# Altium PCB PCB-NCMate-4_2023-08-02.pcbdoc (part 2 of 2)
Units mil, origin at the board's own origin, x right, y up, seen from the top; angles counter-clockwise.
Board outline 7109.99 x 5739.53 mil, 4 copper layers (Top Layer, Mid-Layer 1, Mid-Layer 2, Bottom Layer); 194 components, 159 nets, 662 pads, 368 vias.
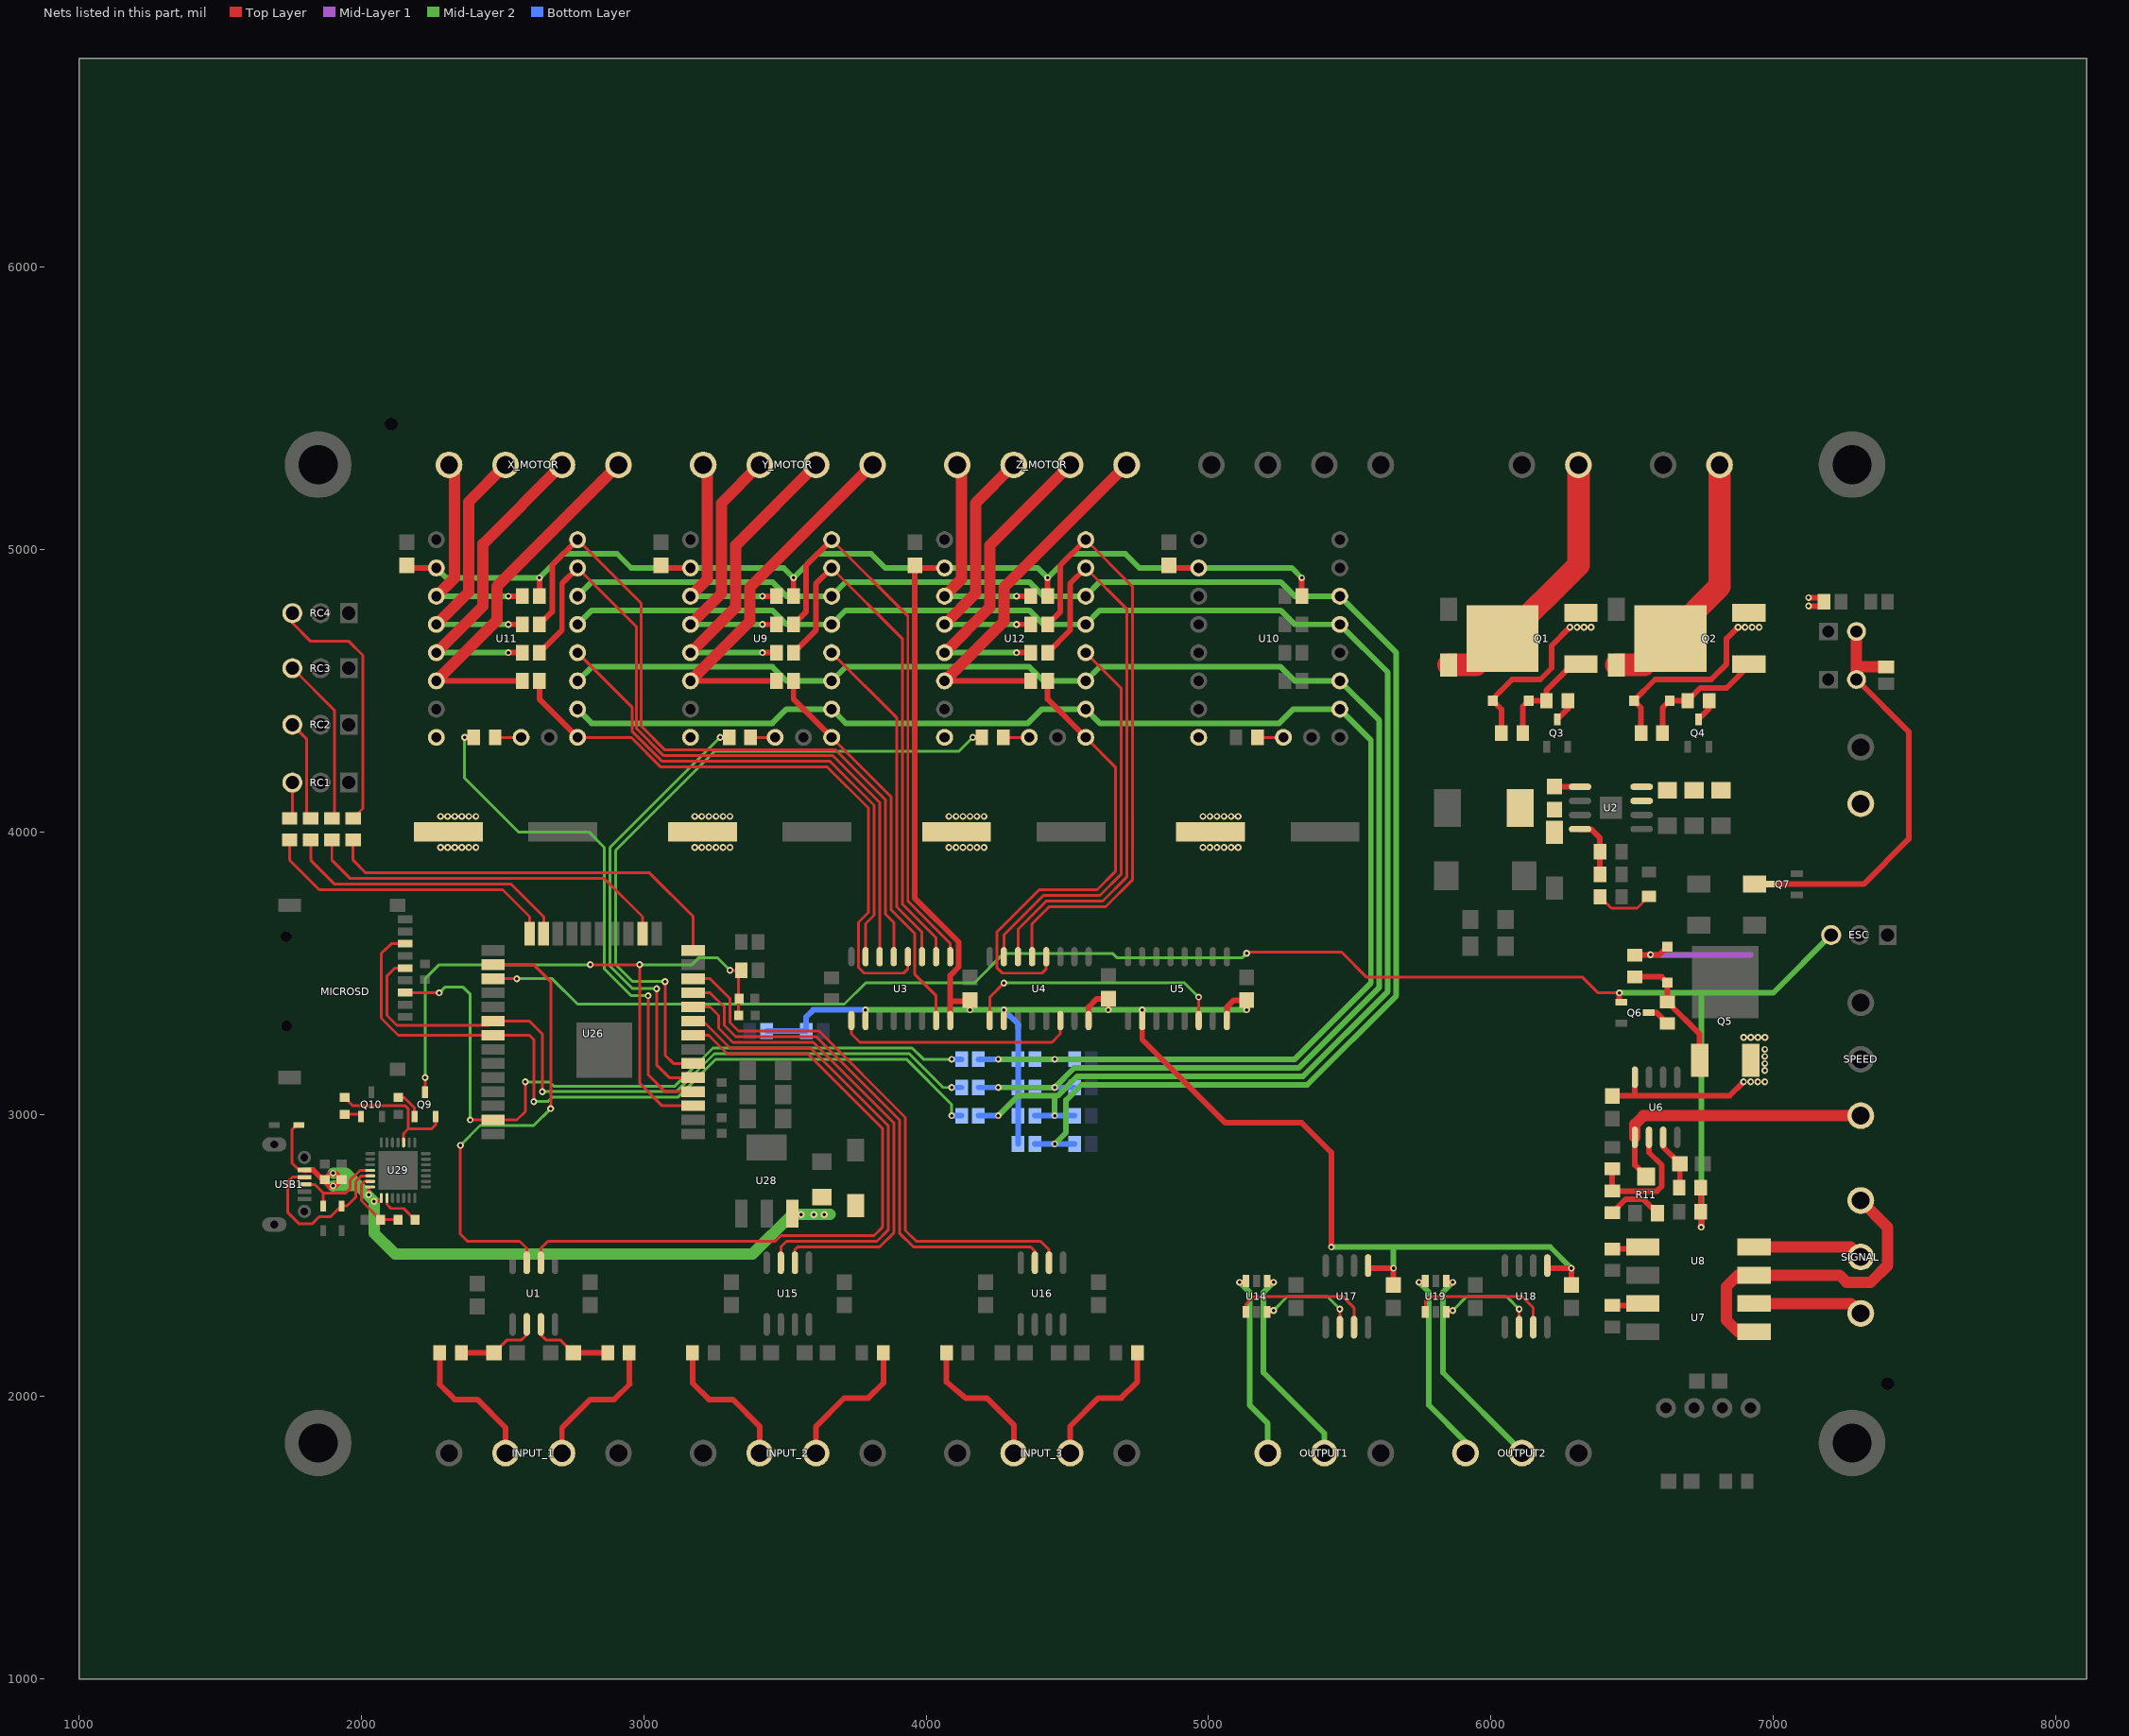
[diagram p4: the nets of this part, all layers, seen from the top]

## Via types
v1: diameter 24, hole 12, Top Layer to Bottom Layer, tented both sides, 368 vias

## Nets (pads, with @x,y where several pads share a name; then routed paths per layer and width w, separated by ;. In a path a pad name is that pad's centre, name@x,y a point inside that pad or via, vN(x,y) a via of type N, cw(c..) or ccw(c..) an arc to the next point about the centre after c; other vN are vias at no path point) (continued)
IN_1: U1.7 U26.26 | length 1674.6
  Top Layer w10: v1(2349.99,2890) 2349.99,2575 2374.99,2550 2559.99,2550 2584.99,2525 U1.7@2584.99,2474.15 ; U26.26@2465.67,3530.07 2609.93,3530.07 2670,3470 v1(2670,3020)
  Mid-Layer 2 w10: v1(2349.99,2890) 2419.99,2960 2609.99,2960 v1(2670,3020)
IN_2: U1.6 U26.8 | length 2449.3
  Top Layer w10: U1.6@2634.99,2474.15 2634.99,2525 2659.99,2550 3464.99,2550 3484.99,2570 3814.99,2570 3844.99,2600 3844.99,2950 3579.99,3215 3294.99,3215 3229.89,3280.1 U26.8@3174.32,3280.07
IN_3: U15.7 U26.9 | length 1674.7
  Top Layer w10: U26.9@3174.32,3330.07 3209.89,3330.1 3304.99,3235 3589.99,3235 3864.99,2960 3864.99,2590 3824.99,2550 3504.99,2550 3484.99,2530 U15.7@3484.99,2474.15
IN_4: U15.6 U26.10 | length 1717.6
  Top Layer w10: U26.10@3174.32,3380.07 3234.89,3380.1 3264.99,3350 3264.99,3305 3314.99,3255 3599.99,3255 3884.99,2970 3884.99,2580 3834.99,2530 3544.99,2530 3534.99,2520 U15.6@3534.99,2474.15
IN_5: U16.7 U26.11 | length 1902.9
  Top Layer w10: U26.11@3174.32,3430.07 3234.89,3430.1 3284.99,3380 3284.99,3315 3324.99,3275 3609.99,3275 3904.99,2980 3904.99,2580 3954.99,2530 4369.99,2530 4384.99,2515 U16.7@4384.99,2474.15
IN_6: U16.6 U26.12 | length 1988.3
  Top Layer w10: U26.12@3174.32,3480.07 3234.89,3480.1 3304.99,3410 3304.99,3325 3334.99,3295 3619.99,3295 3925.99,2989 3925.99,2589 3964.99,2550 4404.99,2550 4434.99,2520 U16.6@4434.99,2474.15
INPUT_1_2: INPUT_1.2 R31.2 | length 495
  Top Layer w20: 2276.95,2046.96 2274.99,2045 2329.99,1990 2409.99,1990 2509.99,1890 INPUT_1.2@2509.99,1800 ; 2276.95,2051.96 R31.2@2276.95,2155
INPUT_1_3: INPUT_1.3 R32.2 | length 500
  Top Layer w20: INPUT_1.3@2709.99,1800 2709.99,1890 2809.99,1990 2894.99,1990 2949.99,2045 2948.03,2046.96 ; 2948.03,2051.96 R32.2@2948.03,2155
INPUT_2_2: INPUT_2.2 R63.2 | length 498.4
  Top Layer w20: 3171.95,2048.04 3229.99,1990 3314.99,1990 3409.99,1895 INPUT_2.2@3409.99,1800 ; 3171.95,2053.04 R63.2@3171.95,2155
INPUT_2_3: INPUT_2.3 R62.2 | length 498.4
  Top Layer w20: INPUT_2.3@3609.99,1800 3609.99,1895 3709.99,1995 3794.99,1995 3848.03,2048.04 ; 3848.03,2053.04 R62.2@3848.03,2155
LED1_2: LED1.2 R3.1 | length 206.9
  Top Layer w10: R3.1@6386.96,3770 6426.96,3730 6518.29,3730 LED1.2@6559.99,3771.7
M0: JP11.2 JP12.2 JP30.2 U9.2 U10.2 U11.2 U12.2 | length 5481.7
  Mid-Layer 2 w20: U11.2@2764.99,4435 2814.99,4385 3454.99,4385 3504.99,4435 U9.2@3664.99,4435 3714.99,4385 4359.99,4385 4409.99,4435 U12.2@4564.99,4435 4614.99,4385 5249.99,4385 5299.99,4435 U10.2@5464.99,4435 5575,4324.99 5575,3465 5305,3195 v1(4455,3195) v1(4255,3195)
  Bottom Layer w20: JP12.2@4185.01,3195 v1(4255,3195) ; JP11.2@4385.01,3195 JP30.2@4525.01,3195
M1: JP13.2 JP14.2 JP31.2 U9.3 U10.3 U11.3 U12.3 | length 5674.3
  Mid-Layer 2 w20: U11.3@2764.99,4535 2814.99,4585 3454.99,4585 3504.99,4535 U9.3@3664.99,4535 3714.99,4585 4364.99,4585 4414.99,4535 U12.3@4564.99,4535 4614.99,4585 5254.99,4585 5304.99,4535 U10.3@5464.99,4535 5604.99,4395 5604.99,3450 5319.99,3165 4524.99,3165 v1(4455,3095) v1(4254.99,3095)
  Bottom Layer w20: JP14.2@4185.01,3095 v1(4254.99,3095) ; JP13.2@4385.01,3095 JP31.2@4525,3095
MISO: JP6.1 MICROSD.7 U26.31 | length 2802.9
  Top Layer w10: MICROSD.7@2154.73,3604.19 2105.79,3604.2 2069.99,3570 2069.99,3340 2129.89,3280.1 U26.31@2465.67,3280.07 ; U26.31@2465.67,3280.07 2594.93,3280.07 2609.99,3265.01 v1(2609.99,3045)
  Mid-Layer 2 w10: v1(2609.99,3045) 2659.99,3045 2674.99,3060 3119.99,3060 3254.99,3195 3929.99,3195 4089.99,3035 v1(4089.99,2995)
  Bottom Layer w20: v1(4089.99,2995) 4099.99,2995 JP6.1@4125.01,2995
MOSI: JP12.1 MICROSD.3 U26.37 | length 2630.5
  Top Layer w10: MICROSD.3@2154.73,3431.24 2155.97,3430 v1(2275,3430) ; v1(2385,2980) U26.37@2465.67,2980.07 2550.09,2980.1 2579.99,3010 v1(2579.99,3115)
  Mid-Layer 2 w10: v1(2275,3430) 2294.99,3450 2359.99,3450 2384.99,3425 v1(2385,2980) ; v1(2579.99,3115) 2664.99,3115 2679.99,3100 3109.99,3100 3244.99,3235 3949.99,3235 3989.99,3195 v1(4089.99,3195)
  Bottom Layer w20: v1(4089.99,3195) JP12.1@4125.01,3195
OUTPUT1_1: OUTPUT1.1 U14.6 | length 671.1
  Top Layer w20: v1(5109.99,2405) 5127.59,2405 U14.6@5132.59,2410
  Mid-Layer 2 w20: v1(5109.99,2405) 5144.99,2370 5144.99,1970 5209.99,1905 OUTPUT1.1@5209.99,1800
OUTPUT1_2: OUTPUT1.2 U14.4 | length 733.2
  Top Layer w20: U14.4@5207.39,2410 5212.39,2405 v1(5229.99,2405)
  Mid-Layer 2 w20: v1(5229.99,2405) 5194.99,2370 5194.99,2085 5409.99,1870 OUTPUT1.2@5409.99,1800
OUTPUT2_1: OUTPUT2.1 U19.6 | length 698
  Top Layer w20: v1(5744.99,2405) 5762.59,2405 U19.6@5767.59,2410
  Mid-Layer 2 w20: v1(5744.99,2405) 5779.99,2370 5779.99,1970 5909.99,1840 OUTPUT2.1@5909.99,1800
OUTPUT2_2: OUTPUT2.2 U19.4 | length 760.1
  Top Layer w20: U19.4@5842.39,2410 5847.39,2405 v1(5864.99,2405)
  Mid-Layer 2 w20: v1(5864.99,2405) 5829.99,2370 5829.99,2085 6109.99,1805 OUTPUT2.2@6109.99,1800
PWM: ESC.3 Q6.1 R9.1 R10.1 U26.27 | length 6358.8
  Top Layer w10: U26.27@2465.67,3480.07 2465.74,3480 v1(2550,3480) ; v1(5134.99,3570) 5139.99,3575 5469.99,3575 5559.99,3485 6324.99,3485 6379.99,3430 v1(6454.99,3430)
  Top Layer w20: v1(6454.99,3430) 6454.99,3403.78 Q6.1@6461.37,3397.4 ; R10.1@6743.03,2740 R9.1@6743.03,2655 6744.99,2653.04 v1(6744.99,2600)
  Mid-Layer 2 w10: v1(2550,3480) 2674.99,3480 2764.99,3390 3709.99,3390 3784.99,3465 4169.99,3465 4274.99,3570 4659.99,3570 4674.99,3555 5119.99,3555 v1(5134.99,3570) ; v1(6454.99,3430) 6499.99,3430
  Mid-Layer 2 w20: v1(6744.99,2600) 6744.99,3430 v1(6454.99,3430) 6999.99,3430 ESC.3@7209.99,3640
PWROUT2_1: D8.2 PWROUT2.1 Q2.2 | length 916.9
  Top Layer w80: D8.2@6444.99,4591.43 6542.49,4591.43 Q2.2@6636.09,4685.03 6636.09,4696.1 6809.99,4870 PWROUT2.1@6809.99,5300
Q1_1: D3.2 Q1.1 R4.2 R5.1 | length 384.2
  Top Layer w20: R4.2@6113.03,4350 6113.03,4444.65 D3.2@6133.38,4465 6196.95,4465 6196.95,4501.96 6289.46,4594.47 Q1.1@6318.89,4594.48
Q1_2: D7.2 PWROUT1.1 Q1.2 | length 961.5
  Top Layer w80: D7.2@5849.99,4591.43 5947.49,4591.43 Q1.2@6041.09,4685.03 6050.02,4685.03 6309.99,4945 PWROUT1.1@6309.99,5300
Q4_3: Q4.3 R6.2 | length 82.1
  Top Layer w20: Q4.3@6734.99,4398.63 6773.03,4436.66 R6.2@6773.03,4465
Q5_1: D5.2 Q5.1 R16.2 R17.1 | length 446.4
  Top Layer w20: R16.2@6509.99,3486.96 6604.64,3486.96 D5.2@6624.99,3466.61 R17.1@6624.99,3398.04 ; R17.1@6624.99,3398.04 6739.49,3283.6 Q5.1@6739.47,3191.1
Q7_3: D9.1 FAN1.2 FAN2.2 JP29.2 Q7.3 | length 1529.3
  Top Layer w20: D9.1@6933.57,3815 Q7.3@6986.37,3815 7319.99,3815 7479.99,3975 7479.99,4355 FAN2.2@7295,4540
  Top Layer w40: FAN2.2@7295,4540 FAN1.2@7295,4710 ; 7295,4585 JP29.2@7400,4585
Q9_1: Q9.1 R19.1 | length 103.8
  Top Layer w10: R19.1@2129.99,3059.66 2150.33,3059.66 2187.59,3022.4 Q9.1@2187.59,2991.64
Q10_1: Q10.1 R20.2 | length 61.2
  Top Layer w10: R20.2@1939.99,3000.34 1988.89,3000.34 Q10.1@1997.59,2991.64
R5_2: Q3.3 R5.2 | length 82.1
  Top Layer w20: Q3.3@6234.99,4398.63 6273.03,4436.66 R5.2@6273.03,4465
R6_1: D4.2 Q2.1 R6.1 R7.2 | length 462.9
  Top Layer w20: R7.2@6608.03,4350 6608.03,4439.65 D4.2@6633.38,4465 6696.95,4465 6741.95,4510 6834.99,4510 6913.89,4588.9 Q2.1@6913.89,4594.48
R11_3: R11.3 R13.2 | length 200
  Top Layer w20: R13.2@6429.99,2651.96 6478.03,2700 6539.4,2700 R11.3@6589.36,2650.04
R15_2: R15.2 U8.1 | length 111
  Top Layer w20: R15.2@6429.99,2523.04 6531.18,2523.04 U8.1@6538.14,2530.01
R17_2: Q6.3 R17.2 | length 82.1
  Top Layer w20: Q6.3@6558.62,3360 6586.95,3360 R17.2@6624.99,3321.96
R56_2: R56.2 RC1.3 | length 131.1
  Top Layer w10: R56.2@1744.99,4048.04 1744.99,4055 1754.99,4065 RC1.3@1754.99,4175
R57_2: R57.2 RC2.3 | length 358.9
  Top Layer w10: RC2.3@1754.99,4380 1804.99,4330 1804.99,4063 R57.2@1819.99,4048.04
R58_2: R58.2 RC3.3 | length 598.2
  Top Layer w10: RC3.3@1754.99,4580 1904.99,4430 1904.99,4058.04 R58.2@1894.99,4048.04
R59_2: R59.2 RC4.3 | length 924.1
  Top Layer w10: RC4.3@1754.99,4775 1754.99,4740 1819.99,4675 1954.99,4675 2004.99,4625 2004.99,4083 R59.2@1969.99,4048.04
R64_2: INPUT_3.3 R64.2 | length 500.5
  Top Layer w20: INPUT_3.3@4509.99,1800 4509.99,1895 4609.99,1995 4689.99,1995 4748.03,2053.04 ; 4748.03,2058.04 R64.2@4748.03,2160
R65_2: INPUT_3.2 R65.2 | length 501.1
  Top Layer w20: 4071.95,2051.96 4139.99,1995 4214.99,1995 4309.99,1900 INPUT_3.2@4309.99,1800 ; 4071.95,2056.96 R65.2@4071.95,2160
RC1: R56.1 U26.24 | length 1064.9
  Top Layer w10: R56.1@1744.99,3971.96 1744.99,3900 1849.99,3795 2499.99,3795 2594.99,3700 U26.24@2595,3639.91
RC2: R57.1 U26.23 | length 1039.9
  Top Layer w10: R57.1@1819.99,3971.96 1819.99,3900 1904.99,3815 2529.99,3815 2644.99,3700 U26.23@2645,3639.91
RC3: R58.1 U26.16 | length 1314.9
  Top Layer w10: R58.1@1894.99,3971.96 1894.99,3900 1959.99,3835 2859.99,3835 2994.99,3700 U26.16@2995,3639.92
RC4: R59.1 U26.14 | length 1479.5
  Top Layer w10: R59.1@1969.99,3971.96 1969.99,3900 2014.99,3855 3019.99,3855 3174.29,3700.7 U26.14@3174.32,3580.07
RESET: C41.2 JP33.2 Q9.3 R55.1 U26.3 | length 2377.8
  Top Layer w10: Q9.3@2224.99,3078.36 v1(2224.99,3130) ; v1(2809.99,3530) v1(2985,3530) 2985,3110 3065,3030 3174.25,3030 U26.3@3174.32,3030.07 ; v1(3305,3510) JP33.2@3345,3510 3335.34,3500.34 R55.1@3335.34,3350
  Mid-Layer 2 w10: v1(2224.99,3130) 2224.99,3480 2274.99,3530 v1(2809.99,3530) ; v1(2985,3530) 3170,3530 3195,3555 3260,3555 v1(3305,3510)
RTS: Q9.2 R20.1 U29.24 | length 500.6
  Top Layer w10: R20.1@1939.99,3059.66 1969.69,3030 2154.99,3030 2164.99,3020 2164.99,2948.2 ; U29.24@2149.02,2900.03 2148.99,2932.2 2164.99,2948.2 ; Q9.2@2262.39,2991.64 2262.39,2962.4 2248.19,2948.2 2164.99,2948.2
S$1126: 
S$12225: 
S$12287: 
S$20338: 
S$20346: 
S$22041: 
S$22043: 
S$22862: 
S$25187: 
S$25189: 
S$31157: 
S$31159: 
S$31254: 
S$31256: 
S$31258: 
S$31553: 
S$31560: 
S$36496: 
SCK: JP14.1 MICROSD.5 U26.30 | length 2601.3
  Top Layer w10: MICROSD.5@2154.73,3517.78 2117.79,3517.8 2089.99,3490 2089.99,3350 2124.99,3315 2450.59,3315 U26.30@2465.67,3330.07 ; U26.30@2465.67,3330.07 2594.93,3330.07 2639.99,3285.01 v1(2639.99,3080)
  Mid-Layer 2 w10: v1(2639.99,3080) 3114.99,3080 3249.99,3215 3939.99,3215 4059.99,3095 v1(4089.99,3095)
  Bottom Layer w20: v1(4089.99,3095) JP14.1@4125.01,3095
SCOMMON: SIGNAL.3 U7.3 U8.3 | length 1124.6
  Top Layer w40: U8.3@6931.84,2430.01 7234.99,2430 7259.99,2405 7344.99,2405 7404.99,2465 7404.99,2600 SIGNAL.3@7309.99,2695 ; U7.3@6931.89,2230 6874.99,2230 6834.99,2270 6834.99,2390 6874.99,2430 U8.3@6931.89,2430
SOUT1: SIGNAL.2 U8.4 | length 392.6
  Top Layer w40: U8.4@6931.84,2530.01 7274.99,2530 SIGNAL.2@7309.99,2495
SOUT2: SIGNAL.1 U7.4 | length 392.6
  Top Layer w40: U7.4@6931.84,2330.01 7274.99,2330 SIGNAL.1@7309.99,2295
STEP_RESET: JP5.2 JP6.2 JP32.2 U9.5 U10.5 U11.5 U12.5 | length 6036.9
  Mid-Layer 2 w20: U11.5@2764.99,4735 2814.99,4785 3454.99,4785 3504.99,4735 U9.5@3664.99,4735 3714.99,4785 4364.99,4785 4414.99,4735 U12.5@4564.99,4735 4614.99,4785 5254.99,4785 5304.99,4735 U10.5@5464.99,4735 5634.99,4565 5634.99,3435 5334.99,3135 4534.99,3135 4464.99,3065 4324.99,3065 v1(4254.99,2995) ; v1(4455,2995) 4455.29,3065
  Bottom Layer w20: JP6.2@4185.01,2995 4230,2995 v1(4254.99,2995) ; JP5.2@4385.01,2995 JP32.2@4525.01,2995
STEP_SLEEP: JP7.2 JP8.2 U9.6 U10.6 U11.6 U12.6 | length 5956.9
  Mid-Layer 2 w20: U11.6@2764.99,4835 2814.99,4885 3454.99,4885 3504.99,4835 U9.6@3664.99,4835 3714.99,4885 4364.99,4885 4414.99,4835 U12.6@4564.99,4835 4614.99,4885 5254.99,4885 5304.99,4835 U10.6@5464.99,4835 5664.99,4635 5664.99,3420 5349.99,3105 4549.99,3105 4494.99,3050 4494.99,2935 v1(4454.99,2895)
  Bottom Layer w20: JP7.2@4385.01,2895 v1(4454.99,2895) JP8.2@4525.01,2895
U1_2: C45.2 R31.1 U1.2 | length 294.7
  Top Layer w10: C45.2@2469.44,2155 2514.44,2200 2564.99,2200 2584.99,2220 U1.2@2584.99,2255.85
  Top Layer w20: R31.1@2353.03,2155 C45.2@2469.44,2155
U1_3: C46.2 R32.1 U1.3 | length 299.6
  Top Layer w10: U1.3@2634.99,2255.85 2634.99,2220 2654.99,2200 2704.99,2200 C46.2@2750.54,2155
  Top Layer w20: C46.2@2750.54,2155 R32.1@2871.95,2155
U2_1: C3.1 U2.1 | length 91.2
  Top Layer w20: C3.1@6224.99,4160.55 6225.54,4160 U2.1@6315.97,4160
U2_4: R1.1 R2.2 U2.4 | length 212.3
  Top Layer w20: U2.4@6315.97,4010 6354.99,4010 6384.99,3980 6384.99,3852 R2.2@6386.99,3850
U2_8: C3.2 D2.2 L1.1 U2.8
U3_9: U3.9 U4.14 | length 879.5
  Top Layer w10: U3.9@3734.99,3342.3 3734.99,3285 3764.99,3255 4444.99,3255 4474.99,3285 U4.14@4474.99,3342.3
U4_9: U4.9 U5.14 | length 926.8
  Top Layer w10: U4.9@4225,3342.3 4225,3415.01 v1(4274.99,3465) ; U5.14@4964.99,3342.3 v1(4964.99,3415)
  Mid-Layer 2 w10: v1(4274.99,3465) 4914.99,3465 v1(4964.99,3415)
U6_2: R12.2 R13.1 U6.2 | length 453.1
  Top Layer w20: R12.2@6429.99,2806.96 R13.1@6429.99,2728.04 6588.03,2728.04 6604.99,2745 6604.99,2820 6559.99,2865 U6.2@6559.99,2918.5
U6_3: C14.2 R10.2 U6.3 | length 204.2
  Top Layer w20: U6.3@6609.99,2918.5 6609.99,2884.45 C14.2@6669.44,2825 6669.44,2742.49 R10.2@6666.95,2740
U7_1: R14.2 U7.1 | length 111
  Top Layer w20: R14.2@6429.99,2323.04 6531.18,2323.04 U7.1@6538.14,2330.01
U9_11: JP19.1 U9.11 Y_MOTOR.1 | length 1337.2
  Top Layer w20: U9.11@3164.99,4535 JP19.1@3469.99,4535
  Top Layer w40: U9.11@3164.99,4535 3374.99,4745 3374.99,4865 Y_MOTOR.1@3809.99,5300
U9_12: JP20.1 U9.12 Y_MOTOR.2 | length 1154.3
  Top Layer w20: v1(3419.99,4635) JP20.1@3469.99,4635
  Top Layer w40: U9.12@3164.99,4635 3324.99,4795 3324.99,5015 Y_MOTOR.2@3609.99,5300
  Mid-Layer 2 w20: U9.12@3164.99,4635 v1(3419.99,4635)
U9_13: JP21.1 U9.13 Y_MOTOR.3 | length 971.5
  Top Layer w20: v1(3419.99,4735) JP21.1@3469.99,4735
  Top Layer w40: U9.13@3164.99,4735 3274.99,4845 3274.99,5165 Y_MOTOR.3@3409.99,5300
  Mid-Layer 2 w20: U9.13@3164.99,4735 v1(3419.99,4735)
U9_14: JP22.2 U9.14 Y_MOTOR.4 | length 801.1
  Top Layer w20: v1(3419.99,4835) JP22.2@3469.99,4835
  Top Layer w40: U9.14@3164.99,4835 3224.99,4895 3224.99,5285 Y_MOTOR.4@3209.99,5300
  Mid-Layer 2 w20: U9.14@3164.99,4835 v1(3419.99,4835)
U9_18: R53.1 U9.18 | length 86.9
  Top Layer w10: R53.1@3378.04,4335 U9.18@3464.99,4335
U10_18: R54.1 U10.18 | length 91.9
  Top Layer w10: R54.1@5173.04,4335 U10.18@5264.99,4335
U11_18: R61.1 U11.18 | length 91.9
  Top Layer w10: R61.1@2473.04,4335 U11.18@2564.99,4335
U12_11: JP15.1 U12.11 Z_MOTOR.1 | length 1337.2
  Top Layer w20: U12.11@4064.99,4535 JP15.1@4369.99,4535
  Top Layer w40: U12.11@4064.99,4535 4274.99,4745 4274.99,4865 Z_MOTOR.1@4709.99,5300
U12_12: JP16.1 U12.12 Z_MOTOR.2 | length 1154.3
  Top Layer w20: v1(4319.99,4635) JP16.1@4369.99,4635
  Top Layer w40: U12.12@4064.99,4635 4224.99,4795 4224.99,5015 Z_MOTOR.2@4509.99,5300
  Mid-Layer 2 w20: U12.12@4064.99,4635 v1(4319.99,4635)
U12_13: JP17.1 U12.13 Z_MOTOR.3 | length 971.5
  Top Layer w20: v1(4319.99,4735) JP17.1@4369.99,4735
  Top Layer w40: U12.13@4064.99,4735 4174.99,4845 4174.99,5165 Z_MOTOR.3@4309.99,5300
  Mid-Layer 2 w20: U12.13@4064.99,4735 v1(4319.99,4735)
U12_14: JP18.2 U12.14 Z_MOTOR.4 | length 801.1
  Top Layer w20: v1(4319.99,4835) JP18.2@4369.99,4835
  Top Layer w40: U12.14@4064.99,4835 4124.99,4895 4124.99,5285 Z_MOTOR.4@4109.99,5300
  Mid-Layer 2 w20: U12.14@4064.99,4835 v1(4319.99,4835)
U12_18: R52.1 U12.18 | length 91.9
  Top Layer w10: R52.1@4273.04,4335 U12.18@4364.99,4335
U14_1: U14.1 U17.7 | length 507.1
  Top Layer w10: U14.1@5132.59,2300 5132.59,2327.6 5159.99,2355 5474.99,2355 5514.99,2315 U17.7@5514.99,2245.85
U14_3: U14.3 U17.6 | length 363.2
  Top Layer w10: U17.6@5464.99,2245.85 v1(5464.99,2310)
  Top Layer w20: U14.3@5207.39,2300 5212.39,2305 v1(5229.99,2305)
  Mid-Layer 2 w10: v1(5229.99,2305) 5279.99,2355 5419.99,2355 v1(5464.99,2310)
U18_6: U18.6 U19.3 | length 363.2
  Top Layer w10: U18.6@6099.99,2245.85 v1(6099.99,2310)
  Top Layer w20: U19.3@5842.39,2300 5847.39,2305 v1(5864.99,2305)
  Mid-Layer 2 w10: v1(5864.99,2305) 5914.99,2355 6054.99,2355 v1(6099.99,2310)
U18_7: U18.7 U19.1 | length 512.9
  Top Layer w10: U19.1@5767.59,2300 5767.59,2337.6 5784.99,2355 6109.99,2355 6149.99,2315 U18.7@6149.99,2245.85
U29_4: D12.2 U29.4 USB1.3 | length 357.6
  Top Layer w10: USB1.3@1797.41,2751.6 1834.31,2751.6 1864.31,2721.6 ; D12.2@1864.32,2675.6 1864.32,2706.6 ; U29.4@2030.9,2801.61 1994.31,2801.6 1959.31,2766.6 1959.31,2736.6 1944.31,2721.6 1864.31,2721.6 ; 1864.31,2706.6 1864.31,2721.6 ; 1864.31,2706.6 1864.31,2721.6
U29_5: D11.2 U29.5 USB1.2 | length 585.5
  Top Layer w10: USB1.2@1797.47,2777.19 1754.91,2777.19 1739.32,2761.6 1739.32,2651.6 1779.32,2611.6 1824.32,2611.6 1849.32,2636.6 1889.32,2636.6 1928.32,2675.6 D11.2@1929.32,2675.6 1948.31,2675.6 1979.31,2706.6 1979.31,2761.6 1999.61,2781.9 U29.5@2030.9,2781.91
U29_9: R60.1 U29.9 | length 143.8
  Top Layer w10: U29.9@2089.92,2703.18 2089.92,2681 2104.32,2666.6 2148.98,2666.6 R60.1@2188.97,2626.6
V0-10: R11.2 SPEED.1 U6.1 | length 1014
  Top Layer w20: U6.1@6509.99,2918.5 6509.99,2819.96 R11.2@6549.99,2779.96
  Top Layer w40: U6.1@6509.99,2918.5 6509.99,2965 6539.99,2995 SPEED.1@7309.99,2995
VBUS: C37.2 C38.2 C39.2 D1.2 D10.2 U28.3 U29.7 U29.8 USB1.1 | length 2632
  Top Layer w10: D1.2@1778.32,2961.6 1769.31,2961.6 1754.31,2946.6 1754.31,2826.6 1778.11,2802.8 USB1.1@1797.41,2802.8 ; v1(2024.99,2715) 2024.99,2736.59 U29.7@2030.9,2742.51 ; v1(2044.32,2691.6) 2058.65,2691.6 U29.8@2070.22,2703.18 ; U28.3@3525.55,2648.07 3528.62,2645 v1(3556.69,2645)
  Top Layer w20: USB1.1@1797.47,2802.78 1828.14,2802.78 1884.32,2746.6 v1(1899.32,2746.6) 1906.88,2746.6 C39.2@1929.32,2769.05 1906.76,2791.6 v1(1899.32,2791.6) 1891.88,2791.6 C38.2@1869.32,2769.05
  Mid-Layer 2 w40: v1(1899.32,2746.6) 1988.81,2747.1 ; v1(1899.32,2791.6) 1944.32,2791.6 v1(2044.32,2691.6) 2044.32,2579.27 2118.59,2505 3384.99,2505 3524.99,2645 v1(3638.68,2644.97) 3659.99,2645
  other v1: 3601.69,2645
VCC: C10.2 C11.2 C12.2 C15.2 C18.2 C19.2 C22.2 C25.2 C26.2 JP1.1 JP5.1 JP7.1 JP9.2 JP10.2 JP11.1 JP13.1 JP18.1 JP22.1 JP26.1 U3.10 U3.16 U4.10 U4.16 U5.10 U5.16 U9.15 U10.15 U11.15 U12.15 U17.1 U18.1 | length 11144.1
  Top Layer w20: C15.2@2159.99,4944.5 2159.99,4935 U11.15@2264.99,4935 ; JP1.1@2629.99,4835 v1(2629.99,4900) ; C18.2@3059.99,4944.5 3059.99,4935 U9.15@3164.99,4935 ; JP22.1@3529.99,4835 v1(3529.99,4900) ; U3.10@3785,3342.31 v1(3785,3370) ; C22.2@3959.99,4944.5 C22.2@3959.99,4935 ; U3.16@4084.99,3342.3 4084.99,3401 4151.54,3401 C10.2@4154.99,3404.45 ; 4084.99,3380 4084.99,3492.1 4114.99,3522.1 4114.99,3610 3959.99,3765 C22.2@3959.99,4935 ; v1(4155,3370) C10.2@4154.99,3404.5 ; U4.10@4275,3342.3 v1(4275,3370) ; JP18.1@4429.99,4835 v1(4429.99,4900) ; U4.16@4575,3342.3 4575,3380.01 4604.44,3409.45 4644.99,3409.45 v1(4645,3370) ; U5.10@4765,3342.31 v1(4765,3370) 4765,3264.99 5059.99,2970 5329.99,2970 5434.99,2865 v1(5434.99,2530) ; C19.2@4859.99,4944.5 4859.99,4935 U10.15@4964.99,4935 ; U5.16@5064.99,3342.3 5064.99,3380 5089.49,3404.5 C12.2@5134.99,3404.5 ; v1(5135,3370) C12.2@5134.99,3404.45 ; JP26.1@5329.99,4835 v1(5329.99,4900) ; U17.1@5564.99,2464.15 5574.14,2455 v1(5654.99,2455) C25.2@5654.99,2395.55 ; U18.1@6199.99,2464.15 6209.14,2455 v1(6284.99,2455) C26.2@6284.99,2395.55 ; C22.2@3959.99,4935 U12.15@4064.99,4935 C22.2@3959.99,4935
  Mid-Layer 2 w20: U11.15@2264.99,4935 2299.99,4900 v1(2629.99,4900) 2714.99,4985 2905,4985 2955,4935 U9.15@3164.99,4935 3494.99,4935 v1(3529.99,4900) 3614.99,4985 3804.99,4985 3854.99,4935 U12.15@4064.99,4935 4394.99,4935 v1(4429.99,4900) 4514.99,4985 4704.99,4985 4754.99,4935 U10.15@4964.99,4935 5294.99,4935 v1(5329.99,4900) ; v1(3785,3370) v1(4155,3370) v1(4275,3370) v1(4645,3370) v1(4765,3370) v1(5135,3370) ; v1(5434.99,2530) 5654.99,2530 v1(5654.99,2455) ; 5604.99,2530 6209.99,2530 v1(6284.99,2455)
  Bottom Layer w20: JP9.2@3435,3295 JP10.2@3575,3295 3575,3345 3600,3370 v1(3785,3370) ; v1(4275,3370) 4324.99,3320 JP11.1@4325.01,3195 JP7.1@4325.01,2895
VDD: C40.2 R60.2 U29.6 | length 251.7
  Top Layer w10: U29.6@2030.9,2762.21 2009.92,2762.2 1999.32,2751.6 1999.32,2694.16 C40.2@2066.88,2626.6 R60.2@2129.66,2626.6
VP: C4.2 C5.2 C6.2 C13.2 C16.1 C17.1 C20.1 C21.1 D3.1 D4.1 D5.1 JP27.2 PWR.1 Q1.3 Q2.3 Q5.3 R4.1 R7.1 R16.1 U2.7 U6.8 U9.9 U10.9 U11.9 U12.9 | length 2376.1
  Top Layer w20: R4.1@6036.95,4350 6036.95,4434.65 D3.1@6006.6,4465 6006.59,4471.6 6074.99,4540 6174.99,4540 6214.99,4580 6214.99,4660 v1(6279.99,4725) ; C13.2@6429.99,3065.55 6845.54,3065.55 v1(6894.99,3115) ; U6.8@6509.99,3131.5 6510.09,3065.5 ; R16.1@6509.99,3563.04 6511.95,3565 v1(6564.99,3565) 6596.6,3565 D5.1@6624.99,3593.39 ; R7.1@6531.95,4350 6531.95,4439.65 D4.1@6506.6,4465 6581.59,4540 6779.99,4540 6834.99,4595 6834.99,4685 v1(6874.99,4725) ; v1(7125,4800) 7174.99,4800 7179.99,4805 JP27.2@7180,4815 7164.99,4830 v1(7125,4830)
  Mid-Layer 1 w20: v1(6564.99,3565) 6919.99,3565
  other v1: 6919.99,3115 6944.99,3115 6969.99,3115 6969.99,3155 6969.99,3180 6969.99,3205 6969.99,3230 6895.43,3272.44 6920.43,3272.44 6945.43,3272.44 6970.43,3272.44 2279.99,3945 2304.99,3945 2329.99,3945 2354.99,3945 2379.99,3945 2404.99,3945 3179.99,3945 3204.99,3945 3229.99,3945 3254.99,3945 3279.99,3945 3304.99,3945 4079.99,3945 4104.99,3945 4129.99,3945 4154.99,3945 4179.99,3945 4204.99,3945 4979.99,3945 5004.99,3945 5029.99,3945 5054.99,3945 5079.99,3945 5104.99,3945 2279.99,4055 2304.99,4055 2329.99,4055 2354.99,4055 2379.99,4055 2404.99,4055 3179.99,4055 3204.99,4055 3229.99,4055 3254.99,4055 3279.99,4055 3304.99,4055 4079.99,4055 4104.99,4055 4129.99,4055 4154.99,4055 4179.99,4055 4204.99,4055 4979.99,4055 5004.99,4055 5029.99,4055 5054.99,4055 5079.99,4055 5104.99,4055 6304.99,4725 6329.99,4725 6354.99,4725 6899.99,4725 6924.99,4725 6949.99,4725
X_CS: U3.7 U11.4 | length 1873.2
  Top Layer w10: U11.4@2764.99,4635 2957.89,4442.1 2957.89,4357.1 3064.99,4250 3659.99,4250 3814.99,4095 3814.99,3705 3784.99,3675 U3.7@3784.99,3557.7
X_DIAG: R61.2 U26.4 | length 1861.9
  Top Layer w10: v1(2365,4335) R61.2@2396.96,4335 ; v1(3015,3420) 3015,3140 3074.9,3080.1 U26.4@3174.32,3080.07
  Mid-Layer 2 w10: v1(2365,4335) 2364.99,4190 2554.99,4000 2804.99,4000 2859.99,3945 2859.99,3515 2954.99,3420 v1(3015,3420)
X_DIR: JP3.2 U3.5 U11.8 | length 2651.5
  Top Layer w10: U11.8@2764.99,5035 2989.99,4810 2989.99,4375 3074.99,4290 3679.99,4290 3854.99,4115 3854.99,3710 3884.99,3680 U3.5@3884.99,3557.7
  Top Layer w20: JP3.2@2629.99,4735 2674.99,4780 2674.99,4945 U11.8@2764.99,5035
X_EN: JP4.2 U3.4 U11.1 | length 2201.2
  Top Layer w10: U11.1@2764.99,4335 2954.99,4335 3059.99,4230 3649.99,4230 3794.99,4085 3794.99,3715 3759.99,3680 3759.99,3520 3779.99,3500 3919.99,3500 3934.99,3515 U3.4@3934.99,3557.7
  Top Layer w20: JP4.2@2629.99,4535 2629.99,4470 U11.1@2764.99,4335
X_MOTOR_1: JP4.1 U11.11 X_MOTOR.1 | length 1337.2
  Top Layer w20: U11.11@2264.99,4535 JP4.1@2569.99,4535
  Top Layer w40: U11.11@2264.99,4535 2479.99,4750 2479.99,4870 X_MOTOR.1@2909.99,5300
X_MOTOR_2: JP2.1 U11.12 X_MOTOR.2 | length 1154.3
  Top Layer w20: v1(2519.99,4635) JP2.1@2569.99,4635
  Top Layer w40: U11.12@2264.99,4635 2429.99,4800 2429.99,5020 X_MOTOR.2@2709.99,5300
  Mid-Layer 2 w20: U11.12@2264.99,4635 v1(2519.99,4635)
X_MOTOR_3: JP3.1 U11.13 X_MOTOR.3 | length 971.5
  Top Layer w20: v1(2519.99,4735) JP3.1@2569.99,4735
  Top Layer w40: U11.13@2264.99,4735 2379.99,4850 2379.99,5170 X_MOTOR.3@2509.99,5300
  Mid-Layer 2 w20: U11.13@2264.99,4735 v1(2519.99,4735)
X_MOTOR_4: JP1.2 U11.14 X_MOTOR.4 | length 805.2
  Top Layer w20: v1(2519.99,4835) JP1.2@2569.99,4835
  Top Layer w40: U11.14@2264.99,4835 2329.99,4900 2329.99,5280 X_MOTOR.4@2309.99,5300
  Mid-Layer 2 w20: U11.14@2264.99,4835 v1(2519.99,4835)
X_STEP: JP2.2 U3.6 U11.7 | length 2527.9
  Top Layer w10: U11.7@2764.99,4935 2973.99,4726 2973.99,4366 3069.99,4270 3669.99,4270 3834.99,4105 U3.6@3834.99,3557.7
  Top Layer w20: JP2.2@2629.99,4635 2709.99,4715 2709.99,4880 U11.7@2764.99,4935
Y_CS: U3.3 U9.4 | length 1209.8
  Top Layer w10: U9.4@3664.99,4635 3894.99,4405 3894.99,3735 3984.99,3645 U3.3@3984.99,3557.7
Y_DIAG: R53.2 U26.5 | length 1619.5
  Top Layer w10: v1(3045,3445) 3045,3174.99 3089.89,3130.1 U26.5@3174.32,3130.07 ; v1(3270,4335) R53.2@3301.96,4335
  Mid-Layer 2 w10: v1(3045,3445) 2959.99,3445 2879.99,3525 2879.99,3945 v1(3270,4335)
Y_DIR: JP21.2 U3.1 U9.8 | length 2007.2
  Top Layer w10: U9.8@3664.99,5035 3934.99,4765 3934.99,3755 4084.99,3605 U3.1@4084.99,3557.7
  Top Layer w20: JP21.2@3529.99,4735 3574.99,4780 3574.99,4945 U9.8@3664.99,5035
Y_EN: JP19.2 U3.15 U9.1 | length 1401.9
  Top Layer w10: U9.1@3664.99,4335 3874.99,4125 3874.99,3725 3959.99,3640 3959.99,3495 4034.99,3420 U3.15@4034.99,3342.3
  Top Layer w20: JP19.2@3529.99,4535 3529.99,4470 U9.1@3664.99,4335
Y_STEP: JP20.2 U3.2 U9.7 | length 1886.5
  Top Layer w10: U9.7@3664.99,4935 3914.99,4685 3914.99,3745 4034.99,3625 U3.2@4034.99,3557.7
  Top Layer w20: JP20.2@3529.99,4635 3609.99,4715 3609.99,4880 U9.7@3664.99,4935
Z_CS: U4.7 U12.4 | length 1418.1
  Top Layer w10: U4.7@4274.99,3557.7 4274.99,3635 4414.99,3775 4614.99,3775 4689.99,3850 4689.99,4510 U12.4@4564.99,4635
Z_DIAG: R52.2 U26.6 | length 2439.2
  Top Layer w10: v1(3075,3470) 3075,3445.01 3074.99,3210 3104.99,3180 U26.6@3174.32,3180.07 ; v1(4165,4335) R52.2@4196.96,4335
  Mid-Layer 2 w10: v1(3075,3470) 2959.99,3470 2899.99,3530 2899.99,3935 3249.99,4285 4114.99,4285 v1(4165,4335)
Z_DIR: JP17.2 U4.5 U12.8 | length 2165.8
  Top Layer w10: U4.5@4374.99,3557.7 4374.99,3675 4434.99,3735 4634.99,3735 4729.99,3830 4729.99,4870 U12.8@4564.99,5035
  Top Layer w20: JP17.2@4429.99,4735 4474.99,4780 4474.99,4945 U12.8@4564.99,5035
Z_EN: JP15.2 U4.4 U12.1 | length 1640.7
  Top Layer w10: U4.4@4424.99,3557.7 4424.99,3515 4409.99,3500 4269.99,3500 4249.99,3520 4249.99,3645 4399.99,3795 4604.99,3795 4669.99,3860 4669.99,4230 U12.1@4564.99,4335
  Top Layer w20: JP15.2@4429.99,4535 4429.99,4470 U12.1@4564.99,4335
Z_STEP: JP16.2 U4.6 U12.7 | length 2069.9
  Top Layer w10: U4.6@4324.99,3557.7 4324.99,3655 4424.99,3755 4624.99,3755 4709.99,3840 4709.99,4790 U12.7@4564.99,4935
  Top Layer w20: JP16.2@4429.99,4635 4509.99,4715 4509.99,4880 U12.7@4564.99,4935
pads on no net: ESC.2 H1.1 H2.1 H3.1 H4.1 MICROSD. MICROSD.1 MICROSD.8 MICROSD.9 R11.1 U2.2 U2.3 U2.5 U5.9 U6.5 U6.6 U6.7 U9.17 U10.17 U11.17 U12.17 U26.17 U26.18 U26.19 U26.20 U26.21 U26.22 U26.32 U29.1 U29.2 U29.10 U29.11 U29.12 U29.13 U29.14 U29.15 U29.16 U29.17 U29.18 U29.19 U29.20 U29.21 U29.22 U29.23 U29.27 U29.29 USB1.4

## Polygon pours and split planes (outlines as drawn)
GND on Bottom Layer "Bottom Layer-GND" (solid, pour order 2): 2109.99,5600 2109.99,3900 6909.99,3900 6909.99,2800 7609.99,2800 7609.99,5600
GND on Bottom Layer "Bottom Layer-GND 1" (solid, pour order 0): 1509.99,5600 2009.99,5600 2009.99,3800 6929.99,3800 6929.99,3605 6924.99,3600 6809.99,3600 6809.99,2700 7609.99,2700 7609.99,1500 1509.99,1500
GND on Mid-Layer 2 "Mid-Layer 2-GND" (solid, pour order 4): 1505,5645 7605,5645 7605,1545 1505,1545
+3V3 on Mid-Layer 1 "Mid-Layer 1-+3V3" (solid, pour order 10): 2209.99,3500 3609.99,3500 3609.99,2700 6409.99,2700 6409.99,2300 2209.99,2300
+5V on Mid-Layer 1 "Mid-Layer 1-+5V" (solid, pour order 8): 1509.99,1500 1509.99,5600 2009.99,5600 2010,3810 2019.99,3810 6809.99,3810 6809.99,2700 7609.99,2700 7609.99,1500 1509.99,1500
VP on Mid-Layer 1 "Mid-Layer 1-VP" (solid, pour order 6): 2109.99,5600 2109.99,3900 6909.99,3900 6909.99,2800 7609.99,2800 7609.99,5600
U2_8 on Top Layer "Top Layer-U2_8" (solid, pour order 42): 5994.99,3965 5994.99,4255 6579.99,4255 6579.99,4140 6474.99,4140 6474.99,4095 6304.99,4095 6304.99,3965 5994.99,3965
GND on Top Layer "Top Layer-GND" (solid, pour order 40): 1500,5645 7600,5645 7600,1545 1500,1545
GND on Top Layer "Top Layer-GND 1" (solid, pour order 38): 5214.99,4100 5214.99,3900 5464.99,3900 5464.99,4100
GND on Top Layer "Top Layer-GND 2" (solid, pour order 36): 4314.99,4100 4314.99,3900 4564.99,3900 4564.99,4100
GND on Top Layer "Top Layer-GND 3" (solid, pour order 34): 3414.99,4100 3414.99,3900 3664.99,3900 3664.99,4100
GND on Top Layer "Top Layer-GND 4" (solid, pour order 32): 2514.99,4100 2514.99,3900 2764.99,3900 2764.99,4100
VP on Top Layer "Top Layer-VP" (solid, pour order 30): 6839.99,4810 6839.99,4700 6984.99,4700 6984.99,4705 6984.99,4810
VP on Top Layer "Top Layer-VP 1" (solid, pour order 28): 6244.99,4810 6244.99,4700 6390,4700 6389.99,4705 6389.99,4810
VP on Top Layer "Top Layer-VP 2" (solid, pour order 26): 6869.99,3295 6994.99,3295 6994.99,3095 6869.99,3095
VP on Top Layer "Top Layer-VP 3" (solid, pour order 24): 2254.99,4100 2254.99,3900 2504.99,3900 2504.99,4100
VP on Top Layer "Top Layer-VP 4" (solid, pour order 22): 3154.99,4100 3154.99,3900 3404.99,3900 3404.99,4100
VP on Top Layer "Top Layer-VP 5" (solid, pour order 20): 4054.99,4100 4054.99,3900 4304.99,3900 4304.99,4100
VP on Top Layer "Top Layer-VP 6" (solid, pour order 18): 4954.99,4100 4954.99,3900 5204.99,3900 5204.99,4100
+5V on Top Layer "Top Layer-+5V" (solid, pour order 16): 5979.99,4255 5774.99,4255 5774.99,3525 5979.99,3525
GND on Top Layer "Top Layer-GND 5" (solid, pour order 14): 5994.99,3950 6324.99,3950 6324.99,4025 6324.99,4080 6909.99,4080 6909.99,3730 6309.99,3730 6310,3525 5995,3525
VP on Top Layer "Top Layer-VP 7" (solid, pour order 12): 6489.99,4095 6924.99,4095 6924.99,3940 7609.99,3940 7609.99,4255 6594.99,4255 6594.99,4125 6489.99,4125

## Other copper
Top Layer:
  region net VBUS: 3499.99,2730 3809.99,2730 3809.99,2585 3499.99,2585 3500,2605
  region net +3V3: 3480,2585 3480,2745 3505,2745 3505,2930 3440,2930 3440,3200 3330,3200 3330,2720 3380,2720 3380,2585

## Silkscreen, mask and mechanical layers (free items; w line width, h text height)
Top Overlay:
  circle w40: c1846.21,1836.22 r161.01
  circle w40: c7279.28,1836.22 r161.01
  circle w40: c7279.28,5300.79 r161.01
  circle w40: c1845,5300 r161.01
  lines w10: 1705,4125 1704.99,4480 1705,5035 2005,5035 2005,4482 2005,4125 ; 7145,4490 7145,5035 7440,5035 7440,4492 ; 7145,4492 7434.49,4492 ; 7155,3685 7155,3875 7455,3875 7455,3685 ; 2834.99,4285 2834.99,5080 2834.99,5085 3004.99,5085 3004.99,4285 2834.99,4285 ; 3734.99,4285 3734.99,5080 3734.99,5085 3904.99,5085 3904.99,4285 3734.99,4285 ; 4634.99,4285 4634.99,5080 4634.99,5085 4804.99,5085 4804.99,4285 4634.99,4285 ; 4774.98,2387.5 4774.98,2492.5 5004.98,2492.5 5004.98,2387.5 4774.98,2387.5 ; 5534.99,4285 5534.99,5080 5534.99,5085 5704.99,5085 5704.99,4285 5534.99,4285
  text "-" at 6104.99,5070 h80 r270
  text "-" at 6604.99,5070 h80 r270
  text "+" at 6316.71,5041.72 h80 r315
  text "+" at 6816.71,5041.72 h80 r315
  text "POUT1" at 6384.99,5000 h80 r180
  text "POUT2" at 6894.99,4995 h80 r180
  text "RC" at 1795,4899.57 h70.87
  text "-" at 1952.44,4900 h55.12 r270
  text "FANS" at 7170,4899.57 h70.87
  text "+" at 1899.49,4880.51 h55.12 r45
  text "4" at 1751.2,4867.3 h55.12 r144
  text "V+" at 7180,4855.31 h39.37
  text "5V" at 7340,4855.31 h39.37
  text "VCC" at 2730.74,4800 h31.5 r90
  text "VCC" at 3635.74,4800 h31.5 r90
  text "VCC" at 4535.74,4800 h31.5 r90
  text "VCC" at 5435.74,4795 h31.5 r90
  text "DIR" at 2730.74,4710 h31.5 r90
  text "DIR" at 3635.74,4710 h31.5 r90
  text "DIR" at 4535.74,4710 h31.5 r90
  text "DIR" at 5435.74,4705 h31.5 r90
  text "-" at 1947.44,4700 h55.12 r270
  text "+" at 1894.49,4680.51 h55.12 r45
  text "3" at 1730,4672.56 h55.12 r180
  text "ON" at 7439.69,4655 h39.37 r90
  text "-" at 7292.44,4650 h55.12 r270
  text "+" at 7234.49,4630.51 h55.12 r45
  text "STEP" at 2730.74,4580 h31.5 r90
  text "STEP" at 3635.74,4580 h31.5 r90
  text "STEP" at 4535.74,4580 h31.5 r90
  text "STEP" at 5435.74,4575 h31.5 r90
  text "-" at 1947.44,4500 h55.12 r270
  text "ENA" at 2730.74,4485 h31.5 r90
  text "ENA" at 3635.74,4485 h31.5 r90
  text "ENA" at 4535.74,4485 h31.5 r90
  text "+" at 1894.49,4480.51 h55.12 r45
  text "ENA" at 5435.74,4480 h31.5 r90
  text "2" at 1730,4472.56 h55.12 r180
  text "Passthrough" at 2519.5,4443.97 h59.05 r88
  text "Passthrough" at 3419.5,4443.97 h59.05 r88
  text "Passthrough" at 4319.5,4443.97 h59.05 r88
  text "Passthrough" at 5219.5,4443.97 h59.05 r88
  text "X-MOTOR" at 3005,4435 h80 r90
  text "Y-MOTOR" at 3905,4435 h80 r90
  text "Z-MOTOR" at 4805,4435 h80 r90
  text "A-MOTOR" at 5705,4435 h80 r90
  text "-" at 7085,4305 h80 r180
  text "-" at 1947.44,4300 h55.12 r270
  text "+" at 1894.49,4280.51 h55.12 r45
  text "1" at 1730,4272.56 h55.12 r180
  text "+" at 7056.72,4093.28 h80 r225
  text "POWER" at 7019.99,4014.3 h80 r89
  text "ESC" at 7215,3739.57 h70.87
  text "-" at 7400.31,3740 h39.37 r270
  text "S" at 7199.69,3735 h39.37 r90
  text "Prog" at 3461.4,3550.69 h59.05 r353
  text "Res" at 3465,3450.47 h59.05
  text "-" at 7084.99,3405 h80 r180
  text "DC" at 7120.42,3140 h70.87 r90
  text "10V" at 7125.42,2915 h70.87 r90
  text "C" at 7054.56,2675 h70.87 r270
  text "DIY-DINHNT" at 4700,2670 h60
  text "SPINDLE" at 6994.99,2610 h80 r90
  text "Motion Controller" at 4480,2580 h50
  text "O1" at 7125.42,2450 h70.87 r90
  text "V1.4" at 4829.99,2391.38 h47.24
  text "O2" at 7125.42,2245 h70.87 r90
  text "+" at 2316.71,2058.28 h80 r225
  text "+" at 3216.71,2058.28 h80 r225
  text "-" at 2959.99,2025 h80 r90
  text "-" at 3819.99,2025 h80 r90
  text "-" at 4719.99,2025 h80 r90
  text "-" at 5649.99,2025 h80 r90
  text "-" at 6359.99,2015 h80 r90
  text "IN1" at 2474.99,2005.47 h59.05
  text "IN2" at 2664.99,2005.47 h59.05
  text "IN3" at 3374.99,2005.47 h59.05
  text "IN4" at 3564.99,2005.47 h59.05
  text "IN5" at 4274.99,2005.47 h59.05
  text "IN6" at 4464.99,2005.47 h59.05
  text "OUT1" at 5129.99,2005.47 h59.05
  text "OUT2" at 5359.99,2005.47 h59.05
  text "+" at 4116.71,2001.72 h80 r315
  text "OUT3" at 5799.99,2000.47 h59.05
  text "OUT4" at 6054.99,2000.47 h59.05
Bottom Overlay:
  lines w10: 3305,3450 3305,3605 3705,3605 3705,3450 ; 3305,3450 3705,3450 ; 3305,3450 3305,3190 3705,3190 3705,3450 ; 3805.01,3450 3805.01,3580 3805.01,3605 5005.01,3605 5005.01,3580 5005.01,3450 ; 3805.01,3450 5005.01,3450 ; 3804.99,3450 3805,2795 5004.99,2795 5004.99,3450
  text "NCMate" at 7147.57,3997.38 h295.28 r1
  text "FluidNC Motion Controller" at 7154.99,3895.95 h118.11
  text "2021 by Christian Luethi" at 5819.99,3802.5 h45
  text "VCC" at 3610,3445.63 h78.74
  text "Driver Configuration" at 4970,3445.63 h78.74
  text "VCC" at 4424.54,3425 h59.05 r90
  text "GND" at 4619.54,3415 h59.05 r90
  text "SPI" at 4219.54,3395 h59.05 r90
  text "3V3" at 3485,3335.47 h59.05
  text "5V" at 3660,3330.47 h59.05
  text "M0" at 4970.01,3135.47 h59.05
  text "M1" at 4970.01,3035.47 h59.05
  text "Reset" at 4970.01,2935.47 h59.05
  text "Sleep" at 4973.61,2840.69 h59.05 r7
Top Solder:
  circle w10: c2105,5445 r25.59
  circle w10: c7405,2045 r25.59
  circle w10: c2105,5445 r25.59
Bottom Solder:
  circle w10: c7405,2045 r25.59
  circle w10: c2105,5445 r25.59